# Altium PCB PCB1.PcbDoc
Units mil, origin at the board's own origin, x right, y up, seen from the top; angles counter-clockwise.
Board outline 1687.01 x 1687.01 mil, 4 copper layers (Component Side, Ground Plane, Power Plane, Solder Side), stack 33.234 mil thick; 42 components, 30 nets, 133 pads, 332 vias.
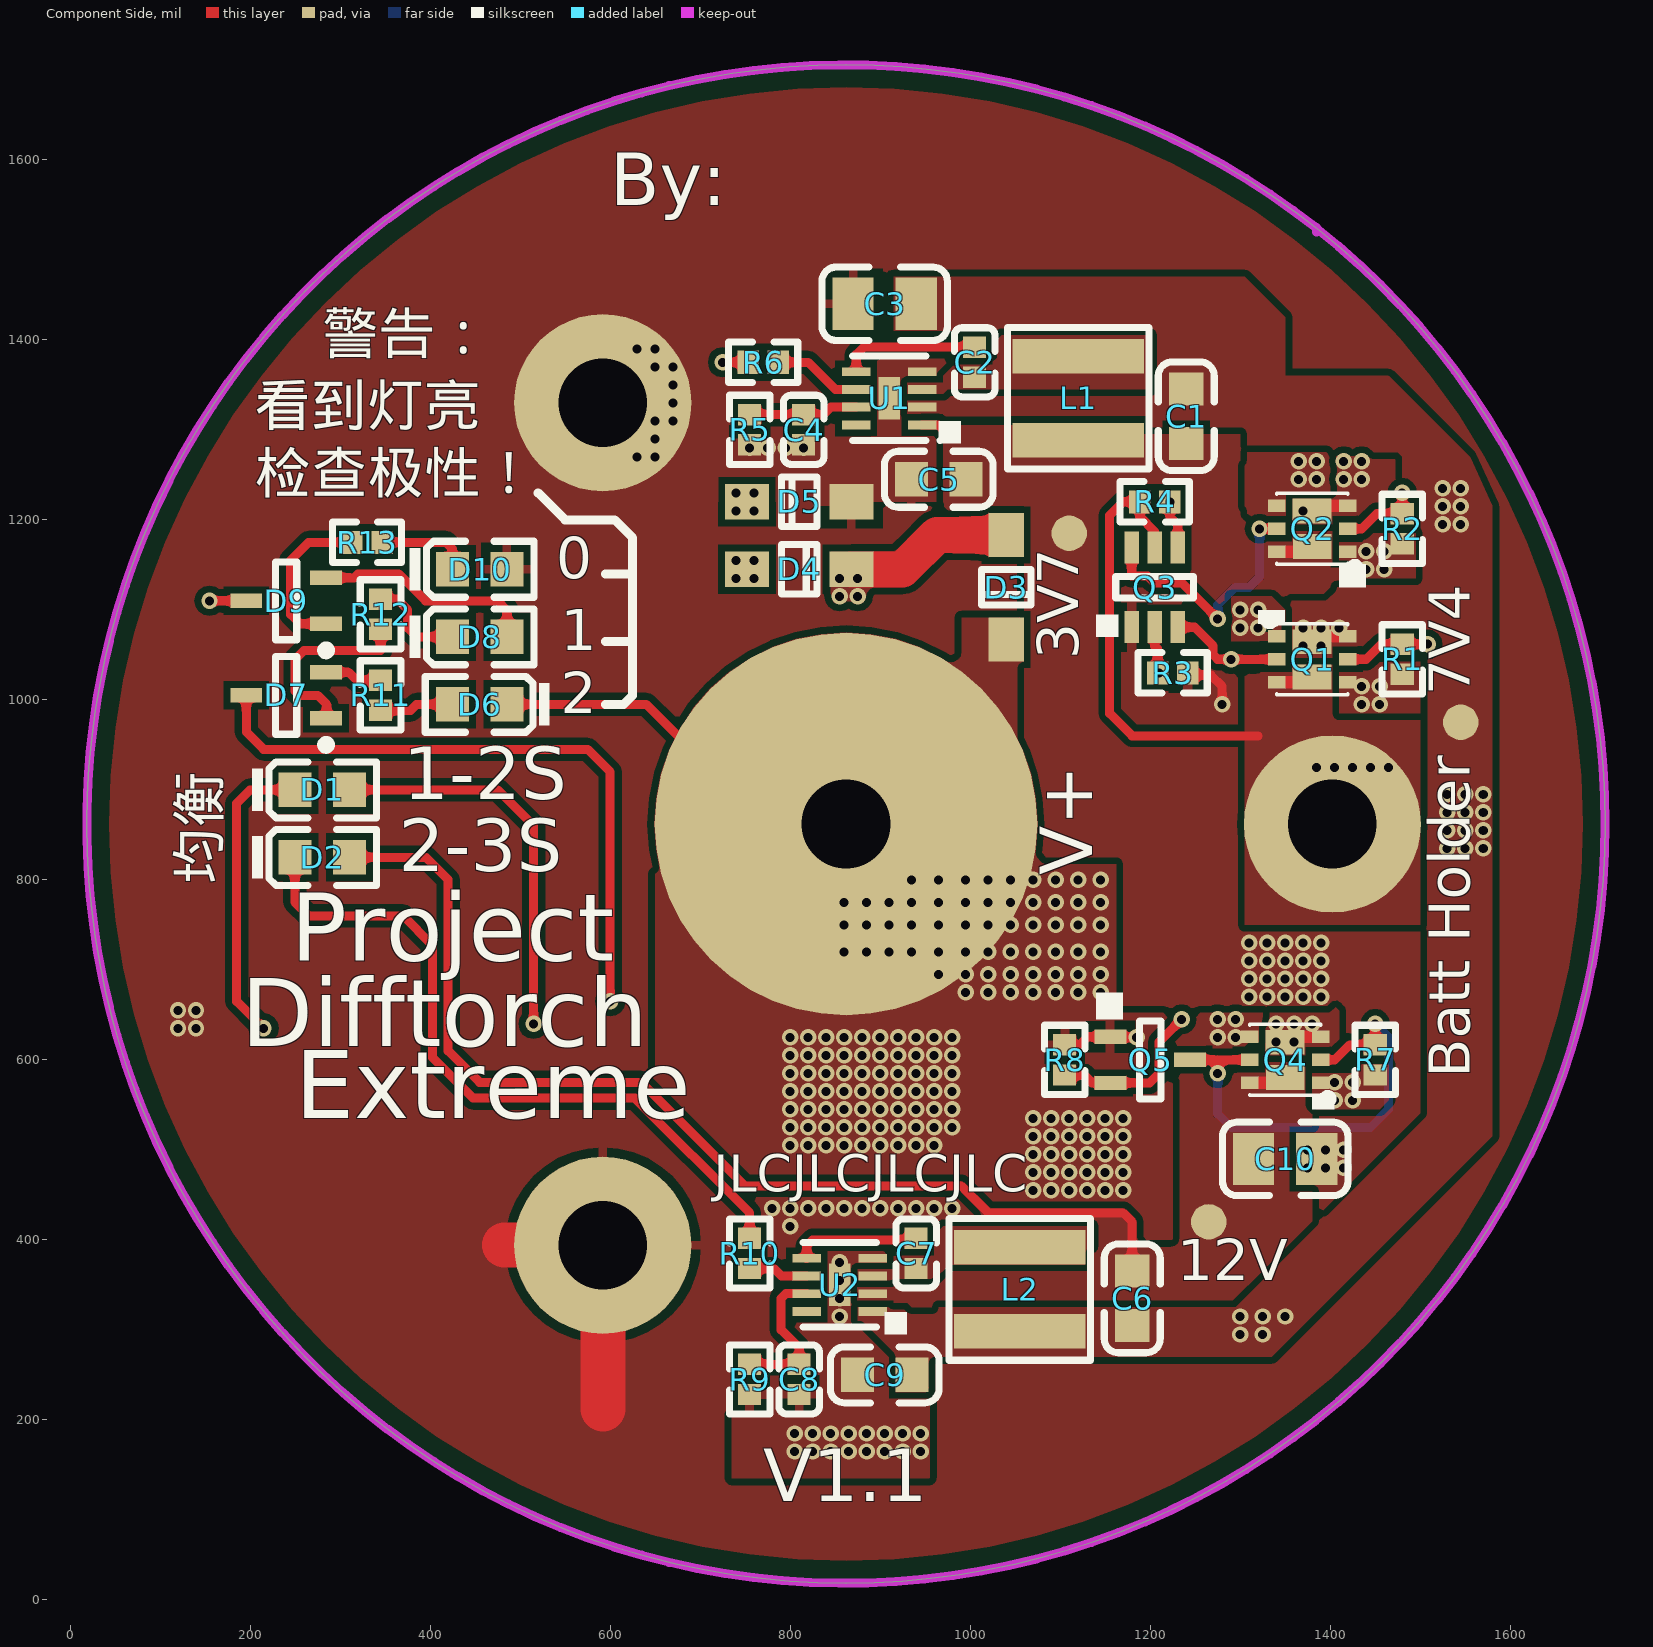
[diagram p0: Component Side view]
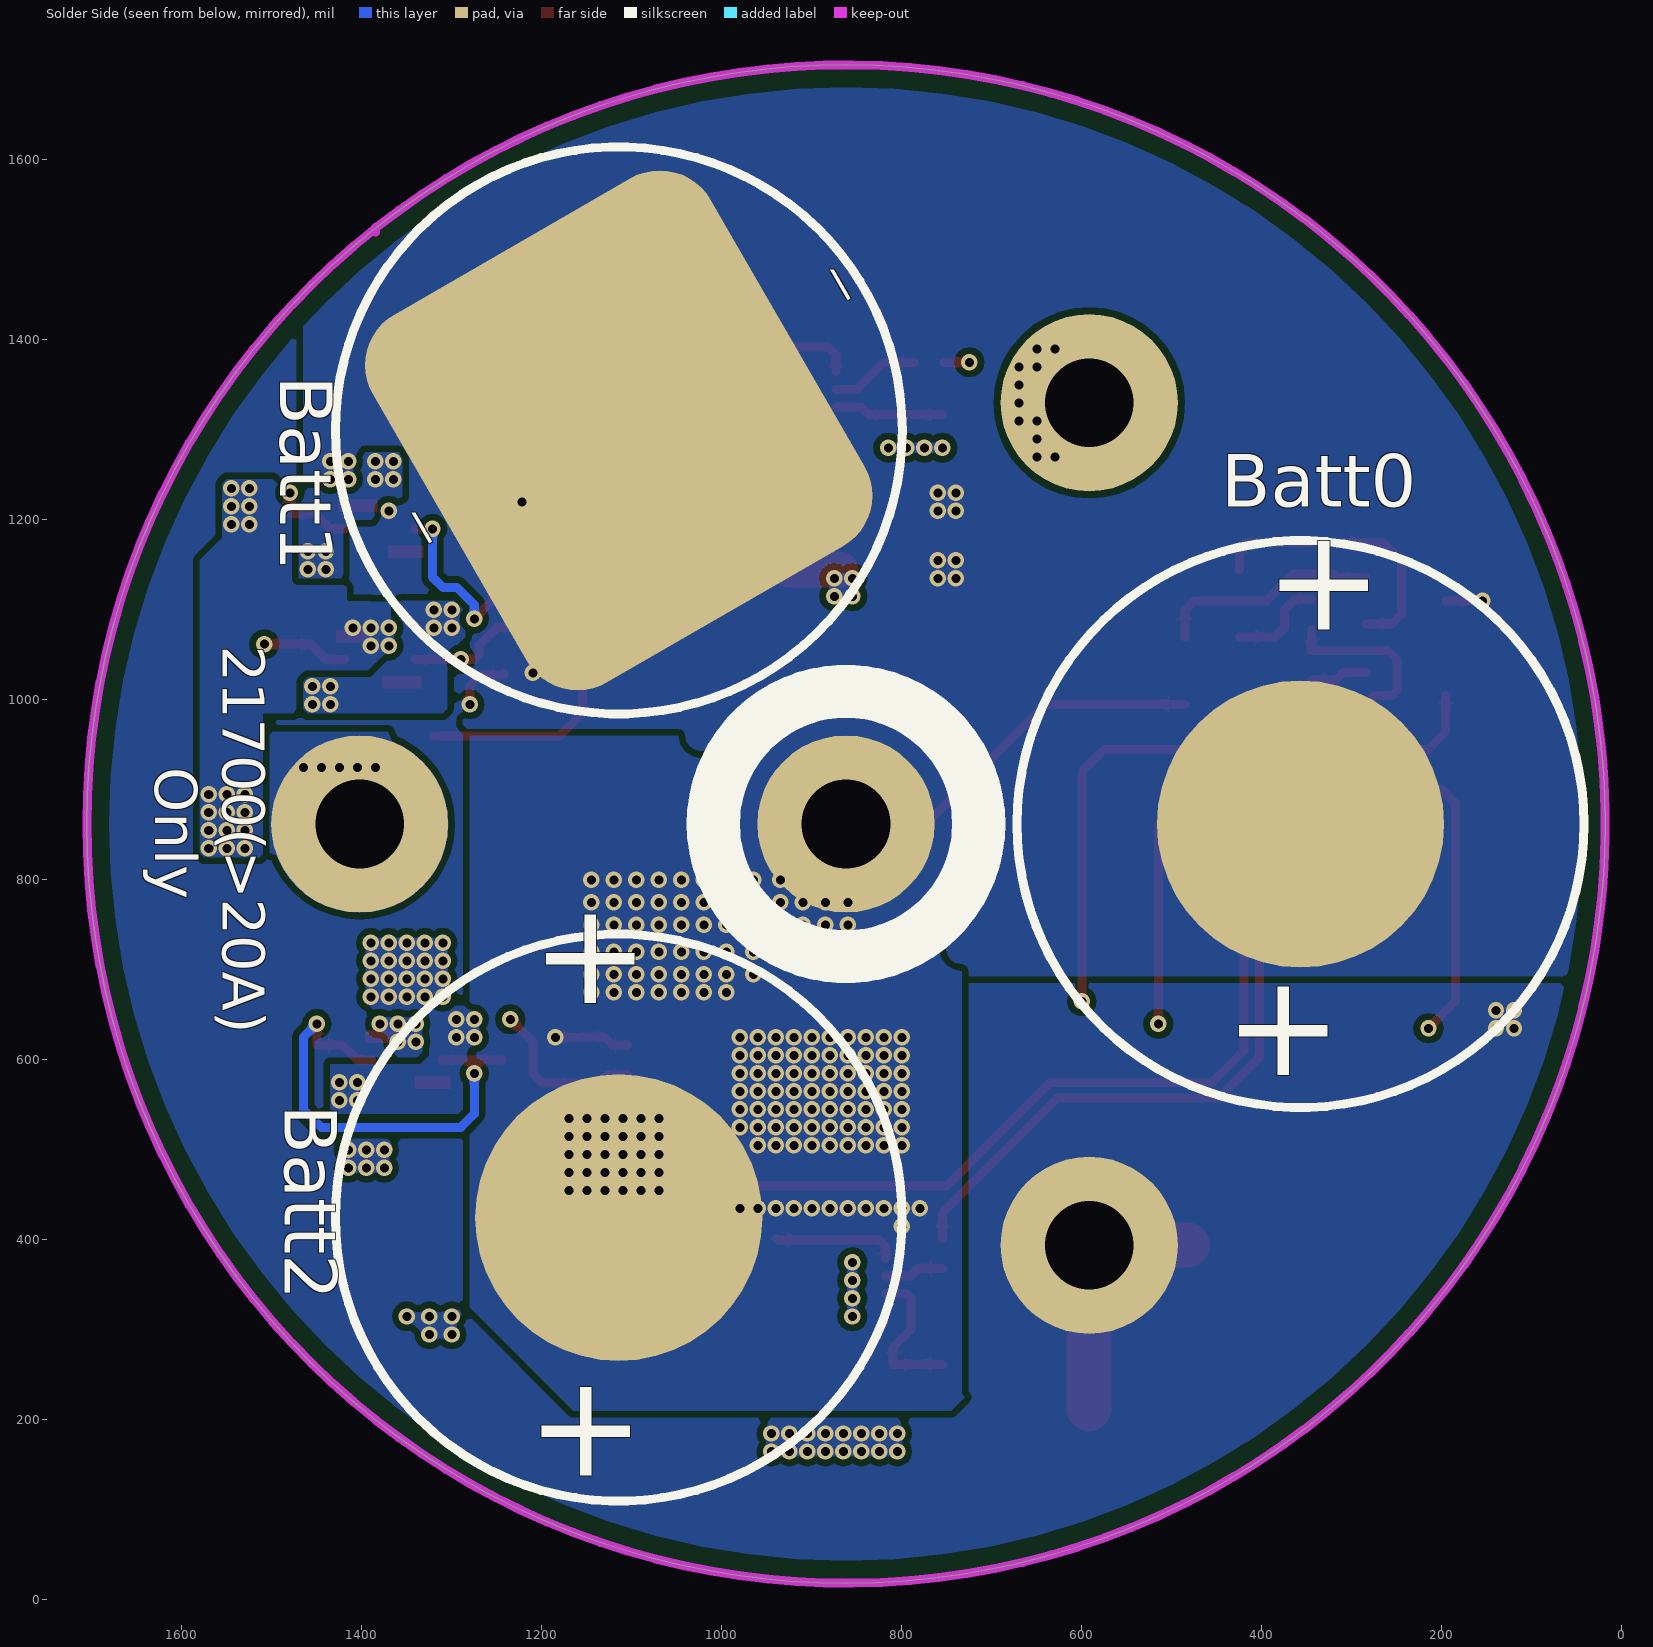
[diagram p1: Solder Side view, seen from below]
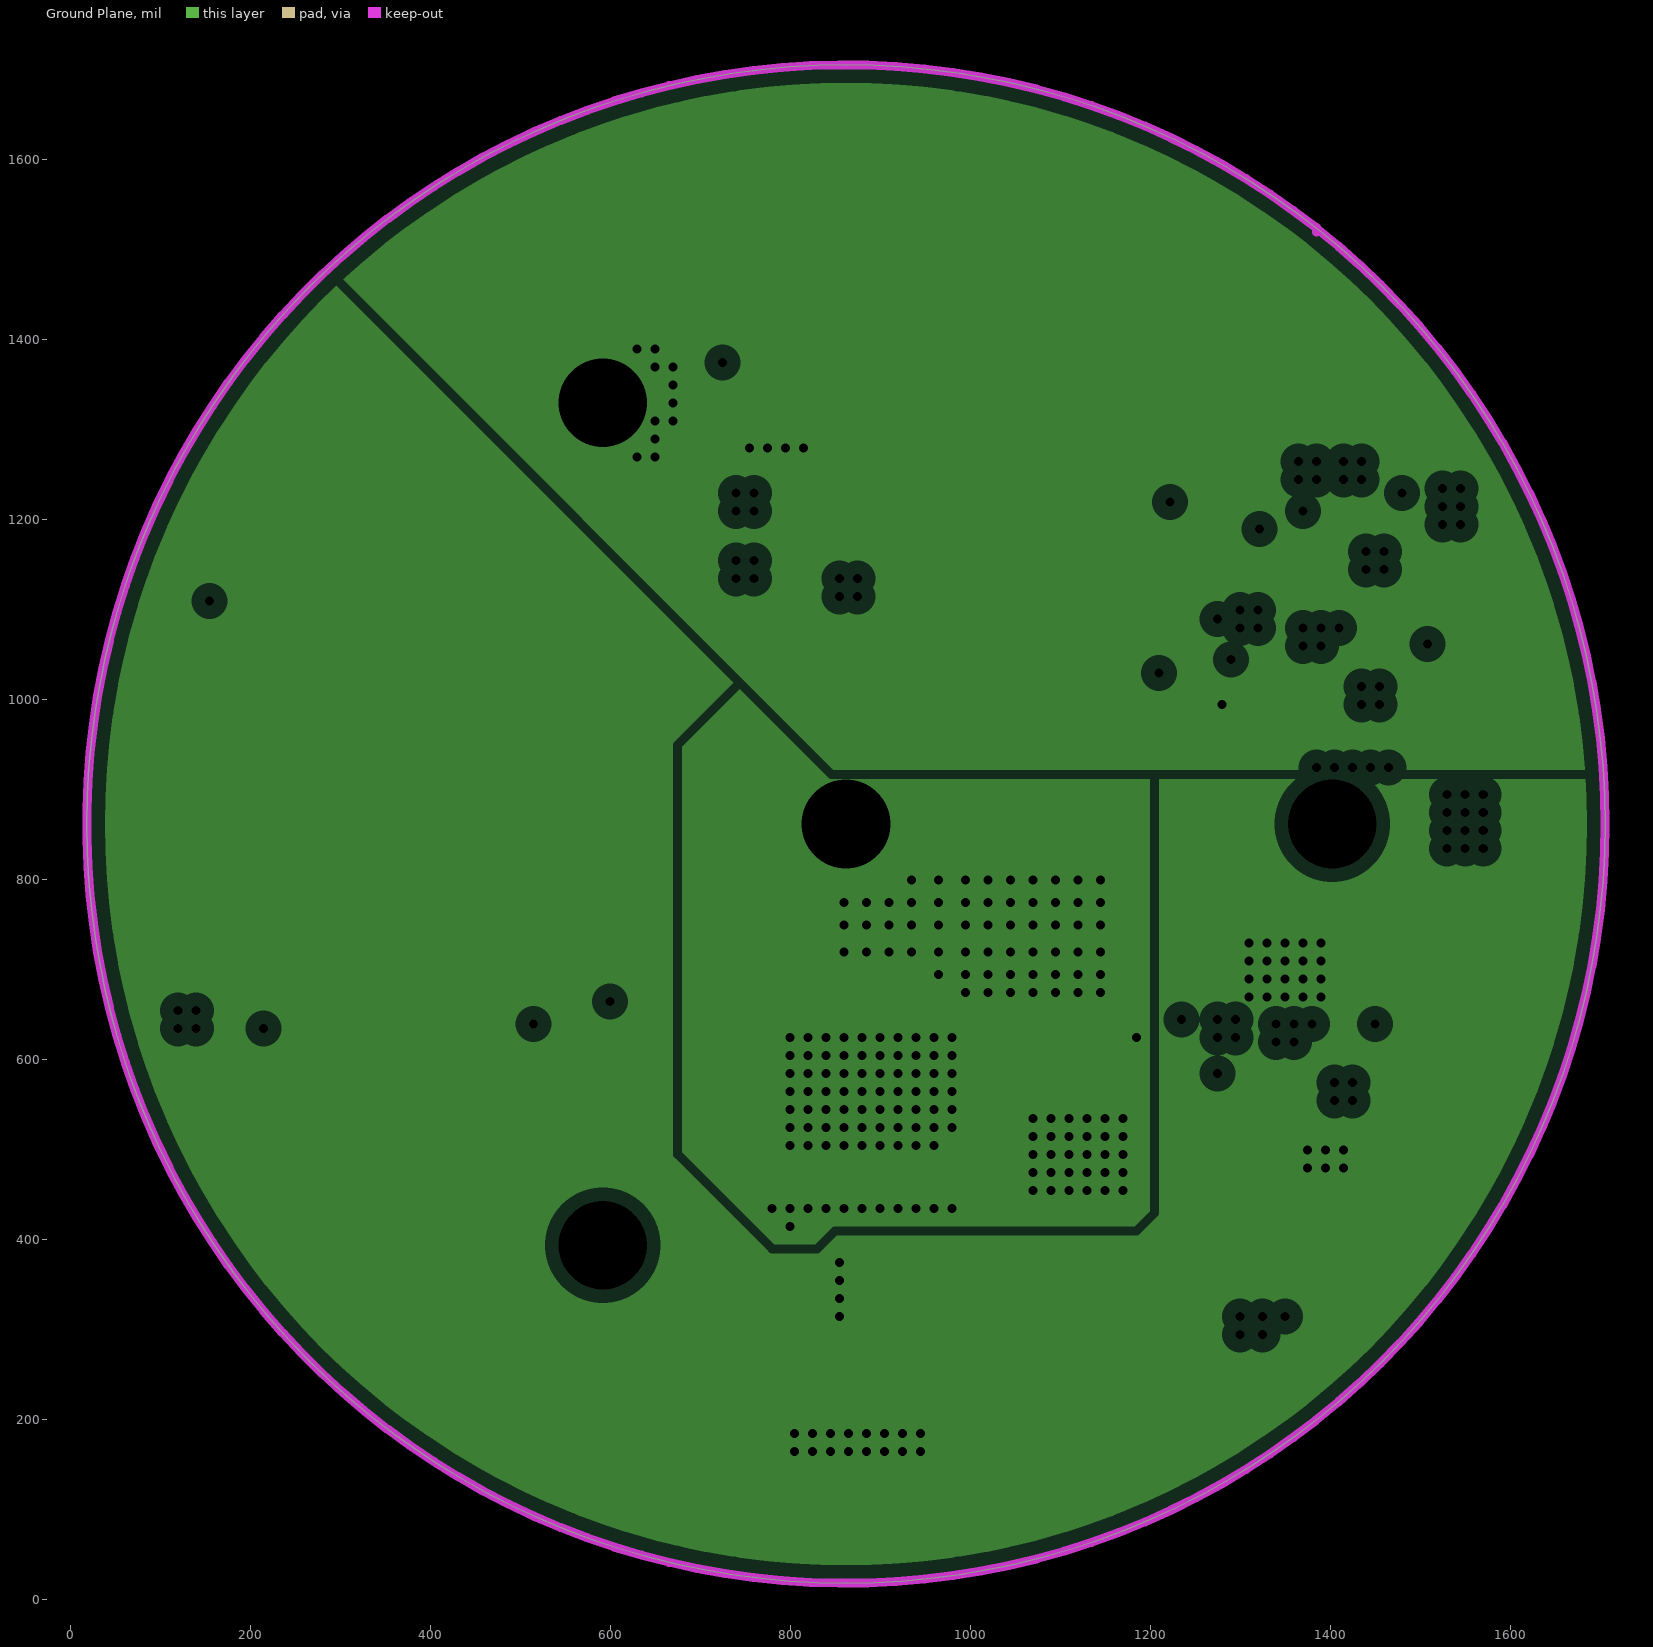
[diagram p2: Ground Plane, clearances drawn from the general rule]
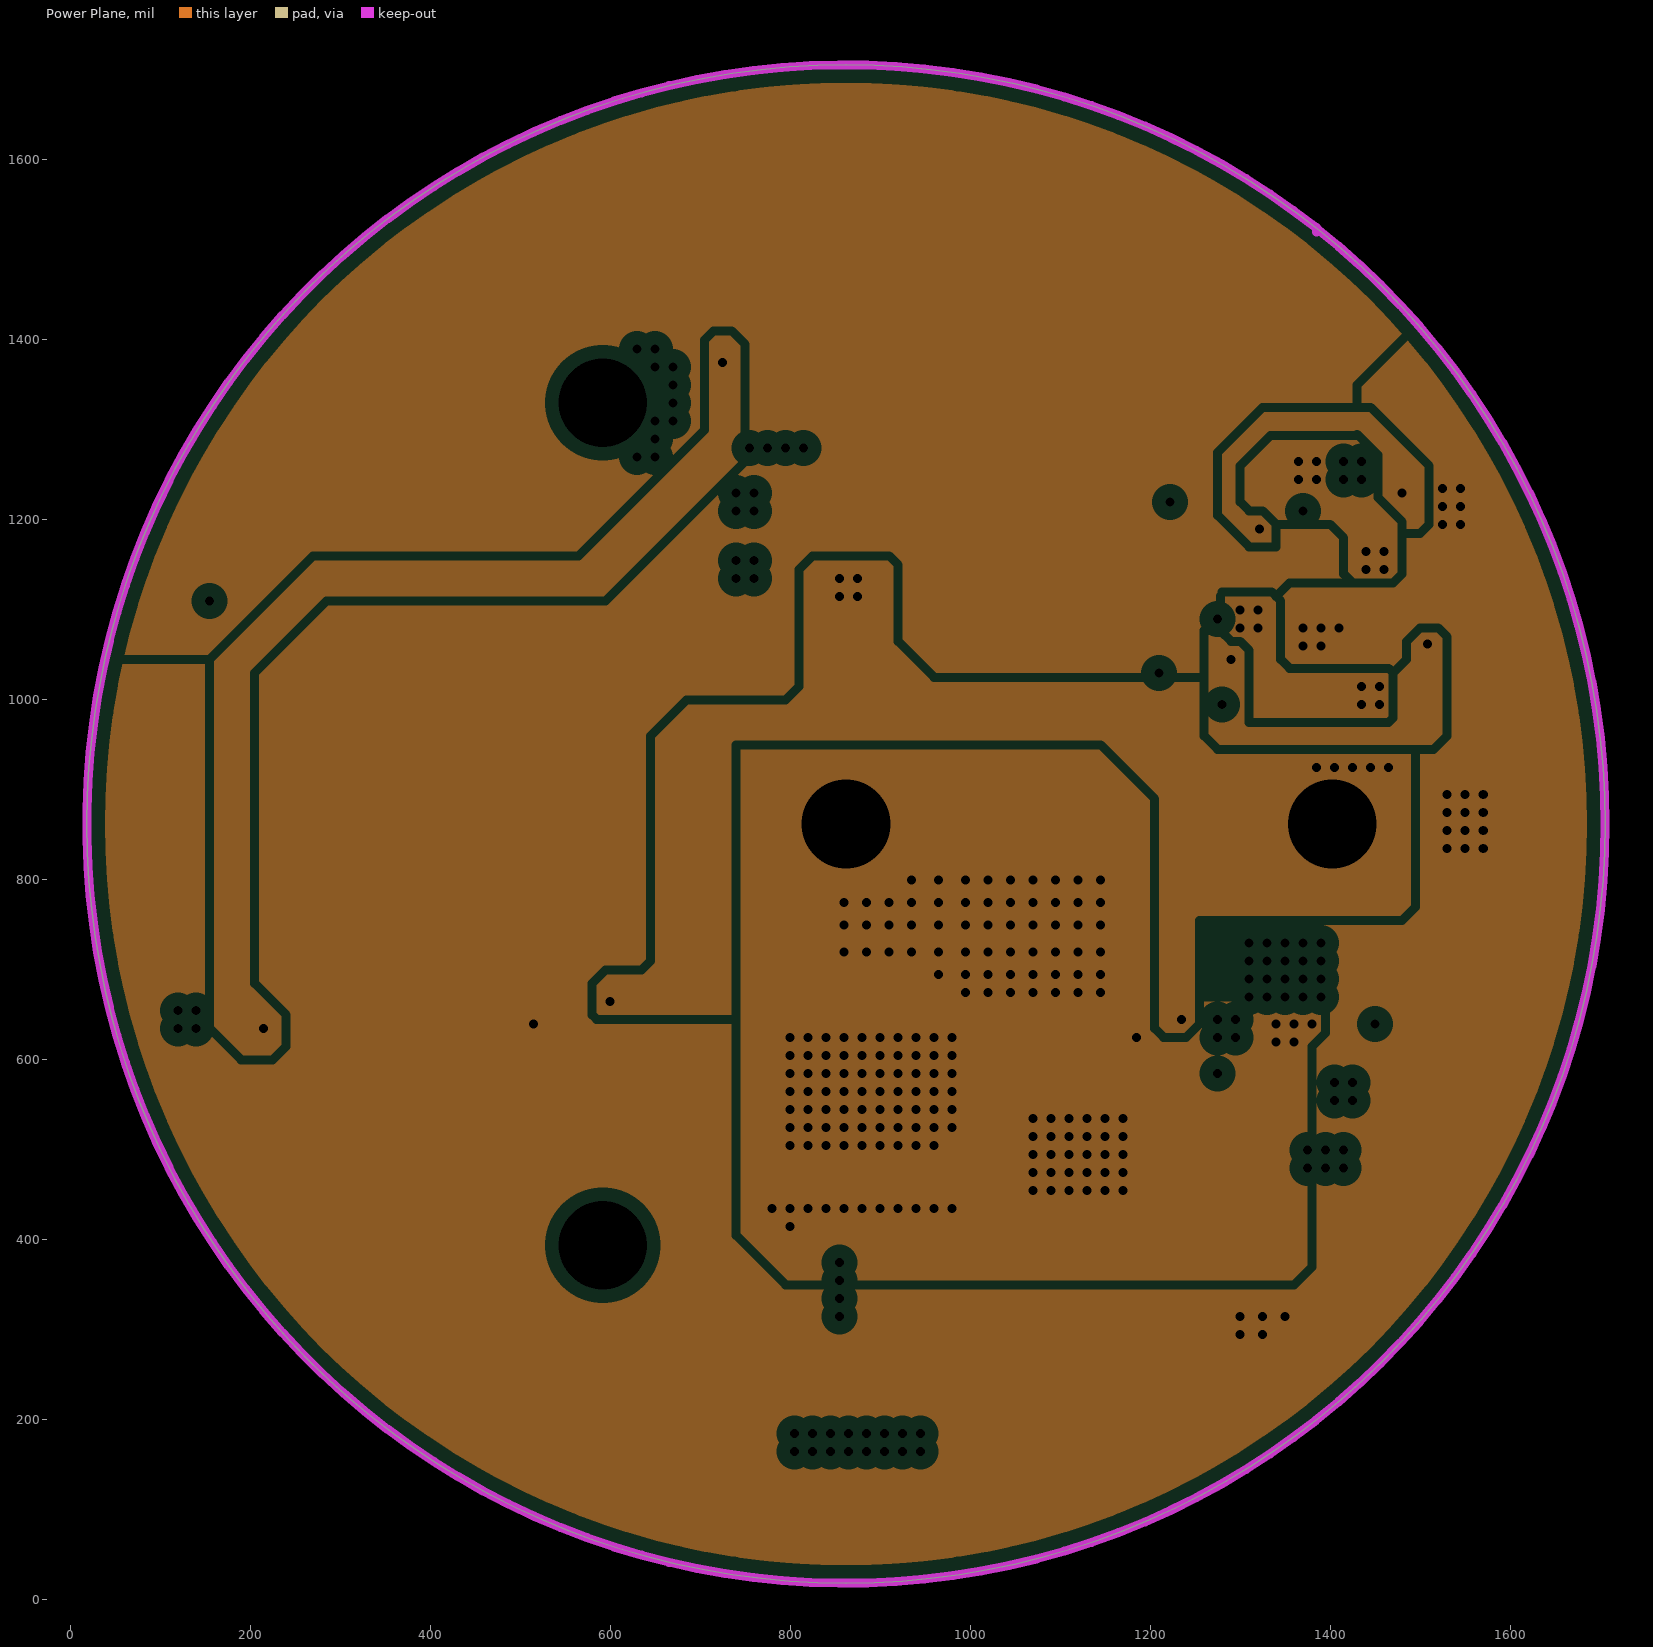
[diagram p3: Power Plane, clearances drawn from the general rule]
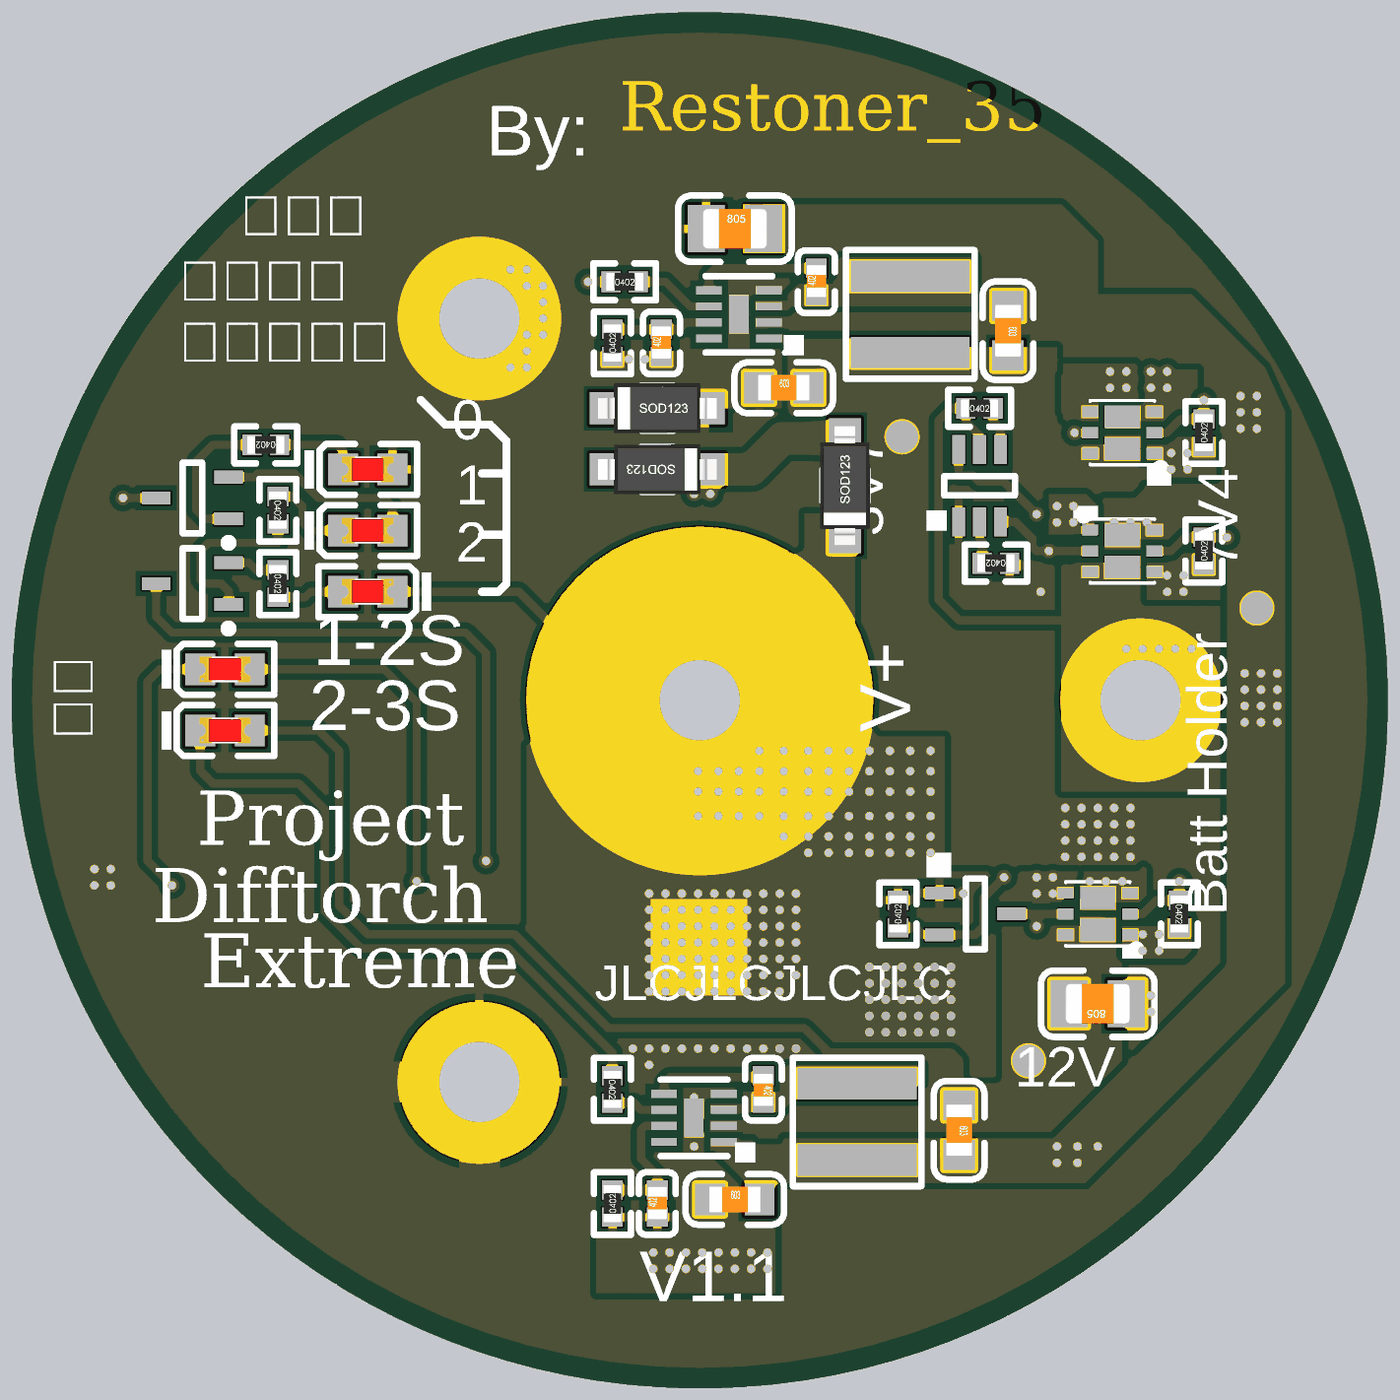
[diagram p4: 3D render of the assembled board from above, using the file's embedded part models]

## Layer stack, top to bottom
Top Solder: solder mask 0.4, Solder Resist, Dk 3.5
Component Side: signal copper 1.4
Dielectric 1: core 12.6, FR-4, Dk 4.8
Ground Plane: plane copper 1.4169, net (Multiple Nets)
Dielectric 3: prepreg 5, Dk 4.2
Power Plane: plane copper 1.4169, net (Multiple Nets)
Dielectric 4: core 10, Dk 4.2
Solder Side: signal copper 1.4
Bottom Solder: solder mask 0.4, Solder Resist, Dk 3.5

## Board outline
862.01,18.5 cw(c862.01,862.01) 18.5,862.01 cw(c862.01,862.01) 862.01,1705.51 cw(c862.01,862.01) 1705.51,862.01 cw(c862.01,862.01)

## Design rules (kind name [scope] priority, off if disabled: settings)
Clearance Clearance_1 [IsArc] p1: gap=20
Clearance [All] p2: gap=7.5
PlaneClearance [All] p1: clearance=15
PlaneConnect [All] p1: planeconnectstyle=Direct reliefexpansion=20 reliefentries=4 reliefconductorwidth=10 reliefairgap=10
PolygonConnect PolygonConnect_1 [IsVia] p1: connectstyle=Direct reliefconductorwidth=10 reliefentries=4 polygonreliefangle="90 Angle" airgapwidth=10
PolygonConnect [All] p2: connectstyle=Direct reliefconductorwidth=10 reliefentries=4 polygonreliefangle="90 Angle" airgapwidth=10
RoomDefinition main [InComponentClass('main')] p1: confinementstyle=ConfineIn formatcopy=TRUE lockcomponents=FALSE outline 1770,55 2910,55 2910,290 1770,290
RoutingVias [All] p1: holewidth=28 width=50 viastyle="Through Hole" minholewidth=28 minwidth=50 maxholewidth=28 maxwidth=50
SolderMaskExpansion [All] p1: expansion=4
Width [All] p1: maxlimit=200 minlimit=8 preferedwidth=10
28 further rules are at their usual default settings.

## Components (designator, comment, footprint, x,y, rotation, side; value= is the part's Value field where it differs from the comment)
C1 "10uF (106) 10% 10V" 0603_C 1240,1315 r270 top
C2 "10nF (103) 10% 50V" 0402_C 1005,1375 r90 top
C3 "22uF (226) 20% 25V" 0805_C 905,1440 r0 top
C4 "1nF (102) 10% 50V" 0402_C 815,1300 r90 top
C5 "10uF (106) 10% 10V" 0603_C 965,1245 r0 top
C6 "10uF (106) 10% 10V" 0603_C 1180,335 r270 top
C7 "10nF (103) 10% 50V" 0402_C 940,385 r270 top
C8 "1nF (102) 10% 50V" 0402_C 810,245 r90 top
C9 "10uF (106) 10% 10V" 0603_C 905,250 r0 top
C10 "22uF (226) 20% 25V" 0805_C 1350,490 r180 top
D1 "白灯 0603" 0603_LED_S1 280,900 r0 top
D2 "白灯 0603" 0603_LED_S1 280,825 r0 top
D3 "SMF5.0CA" SOD-123 1040,1125 r90 top
D4 "SMF5.0CA" SOD-123 810,1145 r180 top
D5 "SMF5.0CA" SOD-123 810,1220 r0 top
D6 "红灯 0603" 0603_LED_S1 455,995 r180 top
D7 "BAV99W" SC70-3 240,1005 r180 top
D8 "红灯 0603" 0603_LED_S1 455,1070 r0 top
D9 "BAV99W" SC70-3 240,1110 r180 top
D10 "红灯 0603" 0603_LED_S1 455,1145 r0 top
L1 "XAL4020-222ME" XAL4020-xxxME 1120,1335 r270 top
L2 "XAL4020-222ME" XAL4020-xxxME 1055,345 r270 top
Q1 "NTLUD3A50PZ" UDFN-6_L2.0-W2.0-P0.65-BL_NTLUD3A50PZ 1380,1045 r270 top
Q2 "NTLUD3A50PZ" UDFN-6_L2.0-W2.0-P0.65-BL_NTLUD3A50PZ 1380,1190 r90 top
Q3 "2N7002DW" SC70-6 1205,1125 r90 top
Q4 "NTLUD3A50PZ" UDFN-6_L2.0-W2.0-P0.65-BL_NTLUD3A50PZ 1350,600 r90 top
Q5 "2N7002KW" SC70-3 1200,600 r0 top
R1 "470KΩ (4703) ±1%" 0402_R 1480,1045 r90 top
R2 "470KΩ (4703) ±1%" 0402_R 1480,1190 r90 top
R3 "1MΩ (1004) ±1%" 0402_R 1225,1030 r180 top
R4 "1MΩ (1004) ±1%" 0402_R 1205,1220 r0 top
R5 "26.1KΩ (2612) ±1%" 0402_R 755,1300 r90 top
R6 "2KΩ (2001) ±1%" 0402_R 770,1375 r0 top
R7 "470KΩ (4703) ±1%" 0402_R 1450,600 r270 top
R8 "1MΩ (1004) ±1%" 0402_R 1105,600 r90 top
R9 "26.1KΩ (2612) ±1%" 0402_R 755,245 r90 top
R10 "2KΩ (2001) ±1%" 0402_R 755,385 r270 top
R11 "1KΩ (1001) ±1%" 0402_R 345,1005 r270 top
R12 "1KΩ (1001) ±1%" 0402_R 345,1095 r270 top
R13 "1KΩ (1001) ±1%" 0402_R 330,1175 r180 top
U1 "ETA3000D2I" DFN2x2-8L 910,1335 r180 top
U2 "ETA3000D2I" DFN2x2-8L 855,350 r180 top

## Footprints (in the part's own frame and the unit in brackets; to place one, negate y for a bottom-side part, rotate by r counter-clockwise, add the part's x,y. Pads: shape width x height; smd on the part's side, far side on the other; paste and mask are expansions set on the pad)
0402_C [mm]
  rect 0.6x0.65 smd mask+0.051: 1(-0.425,0) 2(0.425,0)
  silkscreen extent -0.97,-0.58 0.97,0.58, body extent -0.48,-0.3 0.52,0.3, height 0.2
0402_R [mm]
  rect 0.6x0.65 smd mask+0.051: 1(-0.425,0) 2(0.425,0)
  silkscreen extent -0.97,-0.58 0.97,0.58, body extent -0.57,-0.27 0.58,0.28, height 0.41
0603_C [mm]
  rect 0.93x0.98 smd: 1(-0.77,0) 2(0.77,0)
  silkscreen extent -1.53,-0.79 1.54,0.79, body extent -0.8,-0.4 0.8,0.4, height 0.3
0603_LED_S1 [mm]
  rect 0.93x0.98 smd: A(0.77,0) K(-0.77,0)
  silkscreen extent -1.97,-0.79 1.54,0.79, body extent -0.8,-0.4 0.8,0.4, height 0.6
0805_C [mm]
  rect 1.16x1.47 smd: 1(-0.89,0) 2(0.89,0)
  silkscreen extent -1.77,-1.04 1.77,1.04, body extent -1,-0.62 1,0.63, height 0.77
DFN2x2-8L [mm] "SON, 8-Leads, Body 2.00x2.00mm, Pitch 0.50mm, Thermal Pad 1.20x0.60mm, IPC Medium Density"
  rect 0.8x0.25 smd mask+0.01: 1(-0.93,0.75) 2(-0.93,0.25) 3(-0.93,-0.25) 4(-0.93,-0.75) 5(0.93,-0.75) 6(0.93,-0.25) 7(0.93,0.25) 8(0.93,0.75)
  rect 0.6x1.2 smd mask+0.01: 9(0,0)
  silkscreen extent -1.49,-1.19 1.04,1.24, body extent -1.04,-1.04 1.04,1.04, height 0.8
SC70-3 [mm] "3 Lead SC70(SOT-323) package for small Transistor"
  rect 0.9x0.4 smd mask+0.05: 1(-1.125,0.65) 2(-1.125,-0.65) 3(1.125,0)
  silkscreen extent -1.25,-1.1 0.3,1.52, body extent -0.67,-1.1 0.67,1.1, height 1.1
SC70-6 [mm] "SOT23, 6-Leads, Body 2.00x2.10mm, Pitch 0.65mm, IPC Medium Density"
  rect 0.9x0.4 smd mask+0.05: 1(-1.125,0.65) 2(-1.125,0) 3(-1.125,-0.65) 4(1.125,-0.65) 5(1.125,0) 6(1.125,0.65)
  silkscreen extent -1.25,-1.1 0.3,1.52, body extent -0.67,-1.1 0.67,1.1, height 1.1
SOD-123 [mm]
  rect 1.25x1 smd: 1(1.475,0) 2(-1.475,0)
  silkscreen extent -0.5,-0.7 0.5,0.7, body extent -1.85,-0.77 1.85,0.78, height 1.35
UDFN-6_L2.0-W2.0-P0.65-BL_NTLUD3A50PZ [mm]
  rect 0.35x0.495 smd mask+0.03: 1(-0.65,-1.001) 2(0,-1.001) 3(0.65,-1.001) 4(0.65,1.001) 5(0,1.001) 6(-0.65,1.001)
  rect 0.7x1.1 smd mask+0.03: 3(0.498,0) 6(-0.498,0)
  Component Side region: -0.826,0.226 -0.476,0.226 -0.476,1.239 -0.826,1.239
  Component Side region: 0.475,-1.174 0.826,-1.174 0.826,-0.06 0.475,-0.06
  silkscreen extent -1.22,-1.32 1,1, body extent -1.02,-1.02 1.02,1.02, height 0.55
XAL4020-xxxME [mm] "CoilCraft Molded inductor 4x4mm,2mm height"
  rect 0.98x3.7 smd mask+0.05: 1(-1.185,0) 2(1.185,0)
  silkscreen extent -2,-2 2,2, body extent -2.03,-2.03 2.03,2.03, height 2

## Part data
C1 C5 C6 C9: library part "0603 10uF (106) 10% 10V", "贴片电容"
C2 C7: library part "0402 10nF (103) 10% 50V", "贴片电容"
C3 C10: library part "0805 22uF (226) 20% 25V", "贴片电容"
C4 C8: library part "0402 1nF (102) 10% 50V", "贴片电容"
D1 D2: library part "0603 白灯", "发光二极管"
D3 D4 D5: library part "SOD-123 B5819W  SL", "TVS二极管"
D6 D8 D10: library part "0603 红灯", "发光二极管"
D7 D9: library part "SOT-23 BAV99 A7W", "开关二极管"
L1 L2: library part "Inductor Iron", "Coilcraft XAL4020 Series"
Q1 Q2 Q4: "Dual Symmetric P-MOS -20V -5.6A"
Q3: "Dual N-Channel MOSFET 60V340mA SOT-363"
Q5: library part "2N7002 7002", "MOS(场效应管)"
R1 R2 R7: library part "0402 68KΩ (6802) 1%", "贴片电阻"
R3 R4 R8: library part "0402 1MΩ (1004) 1%", "贴片电阻"
R5 R9: library part "0402 20KΩ (2002) 1%", "贴片电阻"
R6 R10: library part "0402 3.3KΩ (3301) 1%", "贴片电阻"
R11 R12 R13: library part "0402 1KΩ (1001) 1%", "贴片电阻"
U1 U2: "2串锂电池电感主动均衡芯片,DFN2*2封装 2A均衡电流"

## Free pads (board coordinates)
  round 196.85 hole 98.43 mask+1.97: 0(591.83,1329.97) 1(1402.36,862.01) 2(591.83,394.05)
  round 39.37 smd mask+1.97: 0(1110,1185) 1(1545,975) 2(1265,420)
  round 425.2 / inner round 196.85 / far side round 196.85 hole 98.43 mask+1.97: 3(862.01,862.01)
  rrect30% 472.44x433.07 smd far side rot 60 mask+1.97: 4(1114.47,1299.28)
  round 318.9 smd far side mask+1.97: 5(357.09,862.01) 6(1114.47,424.73)

## Via types
v1: diameter 18, hole 10, Component Side to Solder Side, tented both sides, 332 vias

## Nets (pads, with @x,y where several pads share a name; then routed paths per layer and width w, separated by ;. In a path a pad name is that pad's centre, name@x,y a point inside that pad or via, vN(x,y) a via of type N, cw(c..) or ccw(c..) an arc to the next point about the centre after c; other vN are vias at no path point)
3.7V: D4.1 D5.2 D9.3 pad.4 pad.5 Q2.3 Q3.2 Q3.4 R3.2 R4.2 | length 147.1
  Component Side w10: v1(155,1110) D9.3 ; Q3.2 1205,1060 1208.27,1056.73 R3.2 ; v1(1221.73,1220) 1221.73,1203.27 1230.59,1194.41 Q3.4
  other v1: 1210,1030 740,1135 760,1135 740,1155 760,1155 740,1210 760,1210 1370,1210 740,1230 760,1230 1415,1245 1435,1245 1415,1265 1435,1265
7.4V: D3.1 D4.2 D7.3 pad.1@1402.36,862.01 Q1.3 Q3.5 Q5.2 R4.1 R8.1 | length 1571.9
  Component Side w10: D7.3 195.71,964.29 215,945 575,945 600,920 v1(600,665) ; R8.1 1126.73,583.27 1135.59,574.41 Q5.2 1199.41,574.41 1210,585 1210,620 v1(1235,645) ; Q3.5 1205,1186.97 1188.27,1203.7 R4.1 1170,1220 1155,1205 1155,985 1180,960 1320,960
  Component Side w40: D4.2 925,1145 963.07,1183.07 D3.1@1030,1183.07
  other v1: 1385,925 1405,925 1425,925 1445,925 1465,925 855,1115 875,1115 855,1135 875,1135
12V: D3.2 D6.K pad.3 pad.6 Q4.3 Q5.1 R8.2 | length 514.9
  Component Side w10: D6.K 640,995 772.99,862.01 pad.3 ; R8.2 1121.73,616.73 1130.59,625.59 Q5.1 ; Q5.1@1156.3,625 v1(1185,625)
  other v1: 800,415 780,435 800,435 820,435 840,435 860,435 880,435 900,435 920,435 940,435 960,435 980,435 1070,455 1090,455 1110,455 1130,455 1150,455 1170,455 1070,475 1090,475 1110,475 1130,475 1150,475 1170,475 1070,495 1090,495 1110,495 1130,495 1150,495 1170,495 800,505 820,505 840,505 860,505 880,505 900,505 920,505 940,505 960,505 1070,515 1090,515 1110,515 1130,515 1150,515 1170,515 800,525 820,525 840,525 860,525 880,525 900,525 920,525 940,525 960,525 980,525 1070,535 1090,535 1110,535 1130,535 1150,535 1170,535 800,545 820,545 840,545 860,545 880,545 900,545 920,545 940,545 960,545 980,545 800,565 820,565 840,565 860,565 880,565 900,565 920,565 940,565 960,565 980,565 800,585 820,585 840,585 860,585 880,585 900,585 920,585 940,585 960,585 980,585 800,605 820,605 840,605 860,605 880,605 900,605 920,605 940,605 960,605 980,605 1340,620 1360,620 800,625 820,625 840,625 860,625 880,625 900,625 920,625 940,625 960,625 980,625 1340,640 1360,640 1380,640 995,675 1020,675 1045,675 1070,675 1095,675 1120,675 1145,675 965,695 995,695 1020,695 1045,695 1070,695 1095,695 1120,695 1145,695 860,720 885,720 910,720 935,720 965,720 995,720 1020,720 1045,720 1070,720 1095,720 1120,720 1145,720 860,750 885,750 910,750 935,750 965,750 995,750 1020,750 1045,750 1070,750 1095,750 1120,750 1145,750 860,775 885,775 910,775 935,775 965,775 995,775 1020,775 1045,775 1070,775 1095,775 1120,775 1145,775 935,800 965,800 995,800 1020,800 1045,800 1070,800 1095,800 1120,800 1145,800
BST1: C2.2 U1.5 | length 153.9
  Component Side w10: U1.5 873.39,1383.39 881.73,1391.73 C2.2
BST2: C7.1 U2.5 | length 138.9
  Component Side w10: U2.5 818.39,393.39 825,400 938.27,400 C7.1
CELL1: C1.2 C5.2 C8.1 C9.1 C10.1 L1.2 pad.0@1110,1185 Q2.6 R9.1 U1.1 U2.4 U2.9 | length 32.7
  Component Side w10: U1.1 964.53,1305.47 975,1295
  other v1: 805,165 825,165 845,165 865,165 885,165 905,165 925,165 945,165 805,185 825,185 845,185 865,185 885,185 905,185 925,185 945,185 855,315 855,335 855,355 855,375 1375,480 1395,480 1415,480 1375,500 1395,500 1415,500 1310,670 1330,670 1350,670 1370,670 1390,670 1310,690 1330,690 1350,690 1370,690 1390,690 1310,710 1330,710 1350,710 1370,710 1390,710 1310,730 1330,730 1350,730 1370,730 1390,730
CELL2: C1.1 C3.2 C6.2 C9.2 D1.A L2.2 pad.1@1545,975 Q1.6 U1.2 U2.1 | length 441.3
  Component Side w10: D1.A 475,900 515,860 v1(515,640)
  other v1: 1300,295 1325,295 1300,315 1325,315 1350,315 1530,835 1550,835 1570,835 1530,855 1550,855 1570,855 1530,875 1550,875 1570,875 1530,895 1550,895 1570,895 1370,1060 1390,1060 1370,1080 1390,1080 1410,1080 1525,1195 1545,1195 1525,1215 1545,1215 1525,1235 1545,1235
CELL3: C6.1 C10.2 D2.A pad.2@1265,420 Q4.6 U2.2 | length 1203.5
  Component Side w10: D2.A 395.16,825 420,800.16 420,610 455,575 634.75,575 749.75,460 990,460 1020,430 1170,430 1180,420 C6.1
G3.7: Q2.2 Q2.5 Q3.6 R2.2 | length 385.3
  Component Side w10: Q3.6 1179.41,1137.5 1197.25,1137.5 1204.75,1130 1235,1130 v1(1275,1090) ; v1(1321.43,1190) Q2.5 ; Q2.2 1435,1190 1451.73,1206.73 R2.2 v1(1480,1230)
  Solder Side w10: v1(1275,1090) 1275,1105.41 1294.59,1125 1310,1125 1321.43,1136.43 v1(1321.43,1190)
G7.4: Q1.2 Q1.5 Q3.3 R1.2 | length 226.5
  Component Side w10: Q3.3 1249.29,1080.71 1270,1060 1270,1050 1275,1045 v1(1290,1045) Q1.2 ; Q1.5 1440,1045 1456.73,1061.73 R1.2 v1(1508.27,1061.73)
G12: Q4.2 Q4.5 Q5.3 R7.1 | length 522.8
  Component Side w10: Q5.3 1275,600 ; v1(1275,585) 1275,600 ; Q4.5 1275,600 ; Q4.2 1405,600 1421.73,616.73 R7.1 v1(1450,640)
  Solder Side w10: v1(1275,585) 1275,540 1290,525 1445,525 1465,545 1465,625 v1(1450,640)
GND: C3.1 C4.1 C5.1 D5.1 D10.A pad.0@591.83,1329.97 pad.2@591.83,394.05 Q3.1 R3.1 R5.1 U1.4 U1.9 | length 357.2
  Component Side w10: R3.1 1241.73,1027.5 1267.5,1027.5 1280,1015 v1(1280,995)
  Component Side w50: 482.78,394.05 591.83,394.05 591.83,211.83
  other v1: 120,635 140,635 120,655 140,655 630,1270 650,1270 755,1280 775,1280 795,1280 815,1280 650,1290 650,1310 670,1310 670,1330 670,1350 650,1370 670,1370 630,1390 650,1390
NetC4_2: C4.2 R5.2 U1.7 | length 121.9
  Component Side w10: R5.2 C4.2 836.73,1316.73 845.16,1325.16 U1.7
NetC8_2: C8.2 R9.2 U2.7 | length 167.1
  Component Side w10: R9.2 C8.2 810,280 790,300 790,335 795.16,340.16 U2.7
NetD1_K: D1.K R6.1 | length 361.6
  Component Side w10: v1(215,635) 185,665 185,885 200,900 D1.K ; v1(725,1375) R6.1
NetD2_K: D2.K R10.1 | length 799.4
  Component Side w10: D2.K 249.69,775.31 265,760 370,760 402.5,727.5 402.5,602.75 447.75,557.5 627.5,557.5 755,430 R10.1
NetD6_A: D6.A R11.2 | length 82.5
  Component Side w10: R11.2 378.27,988.27 385,995 D6.A
NetD7_1: D7.1 R12.2 | length 214.5
  Component Side w10: D7.1 285,980.12 285,995 275,1005 255,1005 250,1010 250,1045 260,1055 345,1055 R12.2
NetD7_2: D7.2 R11.1 | length 64.4
  Component Side w10: D7.2 309.41,1030.59 318.27,1021.73 R11.1
NetD8_A: D8.A D9.2 | length 249.2
  Component Side w10: D9.2 315.59,1135.59 320,1140 365,1140 395,1110 475,1110 485.32,1099.68 D8.A
NetD8_K: D8.K R12.1 | length 108.7
  Component Side w10: R12.1 363.27,1111.73 375,1100 375,1080 385,1070 D8.K
NetD9_1: D9.1 R13.2 | length 180.2
  Component Side w10: D9.1 255.59,1084.41 245,1095 245,1155 265,1175 R13.2
NetD10_K: D10.K R13.1 | length 103.7
  Component Side w10: R13.1 417.34,1175 424.69,1167.66 D10.K
S3.7: Q2.1 Q2.4 R2.1
  other v1: 1440,1145 1460,1145 1440,1165 1460,1165 1365,1245 1385,1245 1365,1265 1385,1265
S7.4: Q1.1 Q1.4 R1.1
  other v1: 1435,995 1455,995 1435,1015 1455,1015 1300,1080 1320,1080 1300,1100 1320,1100
S12: Q4.1 Q4.4 R7.2
  other v1: 1405,555 1425,555 1405,575 1425,575 1275,625 1295,625 1275,645 1295,645
STAT1: R6.2 U1.6 | length 99.1
  Component Side w10: R6.2 820,1375 850.16,1344.84 U1.6
STAT2: R10.2 U2.6 | length 66.9
  Component Side w10: R10.2 781.73,368.27 790.16,359.84 U2.6
SW1: C2.1 L1.1 U1.3
SW2: C7.2 L2.1 U2.3
pads on no net: U1.8 U2.8

## Polygon pours and split planes (outlines as drawn)
GND on Solder Side "Component Side-No Net 1" (solid, remove dead copper, pour order 151): 720,1295 865,1295 865,1250 855,1260 715,1260
7.4V on Solder Side "Component Side-No Net 1" (solid, remove dead copper, pour order 149): 835,1165 835,1085 840,1080 915,1080 915,1160 920,1165
GND on Solder Side "Component Side-No Net 1" (solid, remove dead copper, pour order 143): 1400,1490 1230,1320 1230,870 1230,555 1170,495 1110,555 520,555 510,555 440,485 430,475 430,190 430,55 475,10 485,0 1655,0 1655,310 1835,490 1825,500 1825,1545
3.7V on Solder Side "Component Side-No Net 1" (solid, remove dead copper, pour order 139): 1477.65,1438.62 1465,1425.97 1465,990 1305,990 1300,985 1280,965 1280,862.01 1280,595 1160,475 1155,470 -240,470 -240,1875 -230,1885 -165,1950 1460,1950
S3.7 on Solder Side "Component Side-No Net 1" (solid, remove dead copper, pour order 135): 1355,1275 1355,1270 1355,1210 1360,1205 1365,1200 1400,1200 1410,1200 1420,1190 1420.76,1189.24 1420.76,1127.35 1473.17,1127.35 1475.41,1129.59 1477.65,1131.83 1477.65,1211.25 1477.65,1227.65 1480,1230 1475,1235 1430,1235 1410,1235 1405,1240 1405,1275
S7.4 on Solder Side "Component Side-No Net 1" (solid, remove dead copper, pour order 75): 1285,1115 1290,1110 1360,1110 1360,1055 1365,1050 1390,1025 1450,1025 1460,1025 1465,1020 1465,990 1460,985 1410,985 1310,985 1305,990 1305,995 1305,1050 1285,1070
CELL2 on Solder Side "Component Side-No Net 1" (solid, remove dead copper, pour order 86): 1360,1108.47 1360,1055 1371.82,1043.18 1460,985 1510,985 1510,825 1570,825 1575,825 1580,830 1580,1035 1580,1155 1555,1180 1555,1240 1550,1245 1510,1245 1498.88,1245 1470,1216.12 1463.88,1210 1410,1210 1410,1146.98 1416.44,1140.54 1416.44,1111.44 1415,1110
12V on Solder Side "Component Side-No Net 1" (solid, remove dead copper, pour order 90): 1022.93,960.67 1023.6,960 1280,960 1280,325 1165,210 970,210 745,210 730,225 733.31,228.31 733.31,723.92 676.08,723.92 595,805 585,815 585,1055 610,1055 690,1135 710,1155 1030,1155 1020,1145
S12 on Solder Side "Component Side-No Net 1" (solid, remove dead copper, pour order 94): 1263.1,613.1 1272.13,613.1 1280,605.23 1280,540 1430,540 1435,545 1435,585 1350,585 1320,585 1310,585 1305,590 1305,650 1300,655 1245,655 1245,595 1240,590 1240,600
S12 on Solder Side "Component Side-No Net 1" (solid, remove dead copper, pour order 95): 1259.46,651.44 1259.46,653.25 1263.1,656.9 1266.21,660 1310,660 1320,660 1325,655 1325,625 1325,605 1330,600 1335,595 1425,595 1435,595 1435,585 1435,565 1420,550 1350,550 1260,550
CELL1 on Solder Side "Component Side-No Net 1" (solid, remove dead copper, pour order 104): 795,440 800,435 910,435 910,285 895,270 890,265 785,265
GND on Solder Side "Component Side-No Net 1" (solid, remove dead copper, pour order 110): 55,685 735,685 740,690 745,685 745,220 1175,220 1183.31,228.31 1280,325 1280,985 1285,990 1295,1000 1755,1010 1755,250 1760,245 1445,-70 1170,-70 140,-70 80,-10
7.4V on Solder Side "Component Side-No Net 1" (solid, remove dead copper, pour order 111): 1330,975 1540,975 1540,795 1515,770 1502.06,757.06 1418.98,757.06 1320.24,757.06 1310,746.82 1295,761.82 1295,970
CELL1 on Solder Side "Component Side-No Net 1" (solid, remove dead copper, pour order 112): 1287.65,757.06 1457.94,757.06 1465,750 1475,740 1475,655 1271.99,655 1267.3,659.7 1260,666.99 1260,755
12V on Solder Side "Component Side-No Net 1" (solid, remove dead copper, pour order 113): 1301.79,666.26 1417.72,666.26 1435.69,648.28 1435,647.59 1435,602.65 1295.81,602.65 1288.16,595
CELL1 on Solder Side "Component Side-No Net 1" (solid, remove dead copper, pour order 114): 1330,515 1475,515 1475,460 1465,450 1450,435 1320,435
CELL1 on Solder Side "Component Side-No Net 1" (solid, remove dead copper, pour order 115): 745,225 1020,225 1030,215 1030,140 750,140 720,110
CELL2 on Solder Side "Component Side-No Net 1" (solid, remove dead copper, pour order 120): 1280,355 1280,260 1370,260 1375,265 1395,285 1395,375
GND on Component Side "Component Side-No Net 1" (solid, remove dead copper, pour order 69): 710,1465 710,1180 700,1170 665,1205 495,1205 465,1205 420,1250 430,1260 430,1440 440,1440 460,1460
GND on Component Side "Component Side-No Net 1" (solid, remove dead copper, pour order 67): -185,1860 -130,1805 1735,1805 1735,5 1740,0 1685,-55 -250,-55
CELL3 on Component Side "Component Side-No Net 1" (solid, remove dead copper, pour order 20): 980,465 990,455 990,340 1230,340 1240,330 1245,335 1245,430 1245,475 1240,480
CELL1 on Component Side "Component Side-No Net 1" (solid, remove dead copper, pour order 159): 923.37,1301.38 943.46,1281.29 943.46,1202.68 1092.32,1202.68 1105,1190 1105,1265 1105,1302.71 1109.78,1307.49
CELL1 on Component Side "Component Side-No Net 1" (solid, remove dead copper, pour order 157): 1065,1250 1065,1070 1145,1070 1155,1060 1155,1235 1100,1235 1085,1250
12V on Component Side "Component Side-No Net 1" (solid, remove dead copper, pour order 155): 987.54,1098.45 987.54,887.46 1020,855 1115,855 1115,1080 1095,1100
CELL1 on Component Side "Component Side-No Net 1" (solid, remove dead copper, pour order 153): 970,1220 1055,1220 1060,1215 1060,1055 1060,650 1080,630 1505,630 1505,1270 1495,1280 1480,1295 975,1295
7.4V on Component Side "Component Side-No Net 1" (solid, remove dead copper, pour order 147): 845,1180 845,1100 850,1095 935,1095 935,1191.4 933.59,1192.82 931.4,1195 830,1195
12V on Component Side "Component Side-No Net 1" (solid, remove dead copper, pour order 145): 955,1115 1065,1115 1085,1095 1045,1055 1045,910 880,910 875,905 900.18,930.18 900.18,1117.81
GND on Component Side "Component Side-No Net 1" (solid, remove dead copper, pour order 137): 1151.72,1101.92 1150,980 1165,965 1320,965 1330,955 1334.25,959.25 1334.25,1115 1155,1115 1145,1125
3.7V on Component Side "Component Side-No Net 1" (solid, remove dead copper, pour order 133): 1395.82,1282.65 1398.47,1280 1485,1280 1485,1200 1465,1180 1340,1180 1340,1295 1330,1305
S3.7 on Component Side "Component Side-No Net 1" (solid, remove dead copper, pour order 131): 1400,1275 1400,1215 1389.39,1204.39 1329.59,1204.39 1329.59,1274.59 1330,1275
S3.7 on Component Side "Component Side-No Net 1" (solid, remove dead copper, pour order 127): 1390,1220 1390,1282.65 1307.65,1282.65 1303.25,1278.25 1303.25,1186.75 1386.75,1186.75 1390,1190
S3.7 on Component Side "Component Side-No Net 1" (solid, remove dead copper, pour order 62): 1305,1260 1305,1215 1310,1210 1350,1210 1350,1260
S3.7 on Component Side "Component Side-No Net 1" (solid, remove dead copper, pour order 63): 1410,1175 1410,1155 1420,1155 1430,1145 1430,1135 1435,1135 1495,1135 1495,1185 1460,1185 1445,1185 1435,1175
CELL1 on Component Side "Component Side-No Net 1" (solid, remove dead copper, pour order 68): 1330,1185 1330,1145 1410,1145 1410,1195 1405,1190 1330,1190
S7.4 on Component Side "Component Side-No Net 1" (solid, remove dead copper, pour order 69): 1290,1115 1335,1115 1350,1100 1350,1065 1290,1065
CELL2 on Component Side "Component Side-No Net 1" (solid, remove dead copper, pour order 70): 1355,1050 1355,1045 1429.69,1045 1430,1045.31 1430,1090 1430,1110 1350,1110
S7.4 on Component Side "Component Side-No Net 1" (solid, remove dead copper, pour order 71): 1410,1035 1420,1035 1445,1035 1455,1045 1500,1045 1500,985 1410,985
7.4V on Component Side "Component Side-No Net 1" (solid, remove dead copper, pour order 74): 1410,1030.61 1410,985 1500,985 1500,750 1320,750 1305,750 1305,905 1305,1045 1419.39,1045
CELL2 on Component Side "Component Side-No Net 1" (solid, remove dead copper, pour order 76): 1357.86,1046.67 1441.67,1046.67 1456.73,1061.73 1508.27,1061.73 1508.27,861.73 1510,860 1510,824.53 1580,824.53 1580,1215 1555,1270 1510,1315 1465,1360 1350,1360 1350,1275 1470,1275 1475,1275 1480,1270 1480,1190 1475,1190 1430,1145 1430,1110 1425,1105 1365,1105
CELL1 on Component Side "Component Side-No Net 1" (solid, remove dead copper, pour order 78): 1400,1185.6 1400,1125 1385,1110 1315,1110 1260,1110 1250,1120 1235,1135 1235,1250 1165,1250 1165,1280 1165,1295 1170,1295 1300,1295 1300,1190 1310,1180 1315.6,1185.6 1357.86,1185.6
CELL2 on Component Side "Component Side-No Net 1" (solid, remove dead copper, pour order 79): 1495,1135 1485,1125 1355,1125 1355,1088.11 1362.07,1081.04 1500.3,1081.04
SW1 on Component Side "Component Side-No Net 1" (solid, remove dead copper, pour order 80): 930,1355 960,1355 965,1355 980,1370 985,1375 1005,1375 1025,1375 1030,1380 1030,1400 1035,1405 1200,1405 1200,1345 1015,1345 975,1345 970,1340 930,1340
S3.7 on Component Side "Component Side-No Net 1" (solid, remove dead copper, pour order 81): 1357.86,1197.14 1355,1200 1285,1200 1285,1270 1290,1275 1356.53,1275 1356.53,1268.47 1357.65,1267.35 1355.7,1265.41 1355.41,1265.41
CELL2 on Component Side "Component Side-No Net 1" (solid, remove dead copper, pour order 82): 1350,1282.65 1072.35,1282.65 1050,1305 1040,1315 930,1315 930,1340 1045,1340 1195,1340 1200,1345 1200,1405 1190,1415 1185,1410 965,1410 915,1410 915,1470 1305,1470 1350,1425 1350,1360 1385,1360 1390,1355 1390,1275
CELL1 on Component Side "Component Side-No Net 1" (solid, remove dead copper, pour order 83): 1050,1305 970,1305 970,1220 1040,1220 1135,1220 1165,1250 1170,1255 1170,1310
GND on Component Side "Component Side-No Net 1" (solid, remove dead copper, pour order 84): 495,1470 690,1470 690,1305 700,1295 705,1290 890,1290 890,1383.46 881.73,1391.73 995,1391.73 995,1225 990,1220 790,1220 500,1220 495,1215
S12 on Component Side "Component Side-No Net 1" (solid, remove dead copper, pour order 92): 1380,585 1425,585 1435,595 1465,595 1465,555 1460,550 1455,545 1405,545 1385,545 1380,550
S12 on Component Side "Component Side-No Net 1" (solid, remove dead copper, pour order 93): 1325,660 1325,620 1310,620 1305,615 1265,615 1265,665 1325,665
12V on Component Side "Component Side-No Net 1" (solid, remove dead copper, pour order 96): 1325,605 1410,605 1410,655 1405,660 1325,660
CELL2 on Component Side "Component Side-No Net 1" (solid, remove dead copper, pour order 97): 1580,828.07 1580,655 1580,515 1520,455 1335,270 965,270 965,325 1070,325 1295,325 1450,510 1465,875 1575,875 1580,880
CELL3 on Component Side "Component Side-No Net 1" (solid, remove dead copper, pour order 98): 1380,595 1380,415 1380,410 1295,325 965,325 935,325 930,330 885,330 870,330 870,350 930,350 960,350 965,350 985,370 1160,370 1225,370 1265,410 1280.01,425.01 1280.01,596.89
CELL3 on Component Side "Component Side-No Net 1" (solid, remove dead copper, pour order 99): 1135.33,364.86 1135,365.2 1135,385 1220,385 1245,410 1280,445 1280,505 1280,568.02 1281.44,569.46 1293.12,581.14 1293.12,585.16 1323.45,585.16 1341.12,567.49 1325,551.38 1325,320 1140,320 1130,310
CELL2 on Component Side "Component Side-No Net 1" (solid, remove dead copper, pour order 100): 875,325 882.2,325 985,325 985,280 975,270 920,270 890,300 880,310 875,310
SW2 on Component Side "Component Side-No Net 1" (solid, remove dead copper, pour order 101): 875,370 895,370 905,370 910,375 910,400 955,400 965,410 970,415 1135,415 1135,365.2 1135.33,364.86 1103.37,332.89 914.86,332.89 882.11,332.89 875,340
CELL1 on Component Side "Component Side-No Net 1" (solid, remove dead copper, pour order 102): 1297.35,750 1500,750 1500,540 1500,520 1395,415 1320,415 1285,415 1280,410
CELL1 on Component Side "Component Side-No Net 1" (solid, remove dead copper, pour order 103): 835,385 910,385 910,324.59 905,310 945,270 955,270 955,135 830,135 800,135 795,140 775,160 775,385
CELL1 on Component Side "Component Side-No Net 1" (solid, remove dead copper, pour order 105): 735,245 943.21,245 955,233.21 955,135 735,135
12V on Component Side "Component Side-No Net 1" (solid, remove dead copper, pour order 106): 1225,400 775,395 735,435 650,520 650,920 650,1020 695,1065 710,1080 1125,1080 1175,1080 1225,1005
CELL3 on Component Side "Component Side-No Net 1" (solid, remove dead copper, pour order 107): 1120,415 1195,415 1215,435 1205,445 1205,640 1320,640 1350,670 1355,665 1355,390 1355,380 1315,340 1310,335 1090,335
12V on Component Side "Component Side-No Net 1" (solid, remove dead copper, pour order 109): 1005,445 1025,425 1025,405 855,405 805,355 800,360 745,360 745,462.72 755.03,472.74 756,471.77 994.88,471.77
CELL1 on Component Side "Component Side-No Net 1" (solid, remove dead copper, pour order 117): 813.39,393.39 813.39,321.61 840,295 840,215 840,155 850,145 855,140 1055,140 1055,405 1070,420 1050,440 810,440 840,440 850,430
12V on Component Side "Component Side-No Net 1" (solid, remove dead copper, pour order 118): 610,615 585,640 585,1115 1040,1115 1060,1095 1150,1005 1150,665 1040,665 1025,650 1025,500 755,500 720,465
CELL2 on Component Side "Component Side-No Net 1" (solid, remove dead copper, pour order 119): 875,310 875,240 905,210 1055,210 1055,330 1050,335 880,335
S12 on Component Side "Component Side-No Net 1" (solid, remove dead copper, pour order 73): 1220,610 1325,610 1330,615 1330,670 1220,670
GND on Ground Plane (split plane): 886.88,1685.13 911.73,1684 936.53,1682.13 961.27,1679.5 985.92,1676.13 1010.45,1672.02 1034.84,1667.16 1059.08,1661.58 1083.14,1655.26 1107,1648.22 1130.64,1640.46 1154.02,1631.99 1177.15,1622.82 1199.98,1612.96 1222.51,1602.4 1244.71,1591.18 1266.56,1579.29 1288.03,1566.74 1309.13,1553.55 1329.81,1539.73 1350.06,1525.3 1369.87,1510.25 1389.22,1494.62 1408.09,1478.4 1426.46,1461.63 1444.31,1444.31 1461.63,1426.46 1478.4,1408.09 1494.62,1389.22 1510.25,1369.87 1525.3,1350.06 1539.73,1329.81 1553.55,1309.13 1566.74,1288.03 1579.29,1266.56 1591.18,1244.71 1602.4,1222.51 1612.96,1199.98 1622.82,1177.15 1631.99,1154.02 1640.46,1130.64 1648.22,1107 1655.26,1083.14 1661.58,1059.08 1667.16,1034.84 1672.02,1010.45 1676.13,985.92 1679.5,961.27 1682.13,936.53 1683.2,922.3 847.95,922.3 303.34,1466.91 315.93,1478.4 334.79,1494.62 354.14,1510.25 373.95,1525.3 394.21,1539.73 414.89,1553.55 435.98,1566.74 457.46,1579.29 479.31,1591.18 501.51,1602.4 524.03,1612.96 546.87,1622.82 569.99,1631.99 593.38,1640.46 617.01,1648.22 640.87,1655.26 664.93,1661.58 689.17,1667.16 713.57,1672.02 738.1,1676.13 762.75,1679.5 787.48,1682.13 812.29,1684 837.14,1685.13 861.21,1685.49 862.01,1685.41 862.81,1685.49
12V on Ground Plane (split plane): 842.24,913.6 843.89,912.5 845.84,912.11 1199.9,912.11 1199.9,432.11 1182.89,415.1 850,415.1 848.05,414.71 846.4,413.6 827.89,395.1 782.11,395.1 680.1,497.11 680.1,947.89 744.02,1011.81
CELL1 on Ground Plane (split plane): 163 vertices, not listed, extent 38.52,38.52 1685.49,1459.98
G3.7 on Power Plane (split plane): 1504.9,1257.89 1504.9,1197.11 1497.89,1190.1 1485.1,1190.1 1485.1,1197.79 1484.71,1199.74 1483.6,1201.4 1457.89,1227.11 1457.89,1272.21 1457.5,1274.16 1456.4,1275.81 1433.6,1298.6 1431.95,1299.71 1430,1300.1 1428.05,1299.71 1426.54,1298.7 1333.6,1298.7 1331.65,1298.31 1330,1297.21 1296.4,1263.6 1295.29,1261.95 1294.9,1260 1294.9,1220 1295.29,1218.05 1296.4,1216.4 1306.4,1206.4 1308.05,1205.29 1310,1204.9 1322.89,1204.9 1334.9,1192.89 1334.9,1175.1 1312.11,1175.1 1280.1,1207.11 1280.1,1272.89 1327.11,1319.9 1442.89,1319.9
S3.7 on Power Plane (split plane): 1447.69,1270.1 1447.69,1225 1448.08,1223.05 1449.19,1221.4 1474.9,1195.68 1474.9,1142.11 1467.89,1135.1 1427.11,1135.1 1420.1,1142.11 1420.1,1142.79 1420.1,1180 1419.71,1181.95 1418.6,1183.6 1403.6,1198.6 1401.95,1199.71 1400,1200.1 1342.11,1200.1 1328.6,1213.6 1326.95,1214.71 1325,1215.1 1312.11,1215.1 1305.1,1222.11 1305.1,1257.89 1335.72,1288.51 1429.28,1288.51
G7.4 on Power Plane (split plane): 1524.9,1067.89 1524.9,962.11 1512.89,950.1 1277.11,950.1 1265.1,962.11 1265.1,1071.85 1275.94,1071.85 1286.4,1061.4 1288.05,1060.29 1290,1059.9 1297.89,1059.9 1304.9,1052.89 1304.9,975 1305.29,973.05 1306.4,971.4 1308.05,970.29 1310,969.9 1465,969.9 1466.95,970.29 1468.6,971.4 1473.6,976.4 1474.71,978.05 1475.1,980 1475.1,1027.89 1488.6,1041.4 1489.71,1043.05 1490.1,1045 1490.1,1062.89 1502.11,1074.9 1517.89,1074.9
S7.4 on Power Plane (split plane): 1339.9,1107.89 1339.9,1045 1340.29,1043.05 1341.4,1041.4 1351.4,1031.4 1353.05,1030.29 1355,1029.9 1462.89,1029.9 1464.9,1027.89 1464.9,982.11 1462.89,980.1 1315.1,980.1 1315.1,1055 1314.71,1056.95 1313.6,1058.6 1303.6,1068.6 1301.95,1069.71 1300,1070.1 1292.11,1070.1 1283.15,1079.06 1283.15,1114.9 1332.89,1114.9
7.4V on Power Plane (split plane): 914.9,1147.89 914.9,1065 915.29,1063.05 916.4,1061.4 956.4,1021.4 958.05,1020.29 960,1019.9 1254.9,1019.9 1254.9,960 1255.29,958.05 1256.4,956.4 1271.4,941.4 1273.05,940.29 1275,939.9 1489.9,939.9 1489.9,772.11 1477.89,760.1 1255,760.1 1253.05,759.71 1251.4,758.6 1250.29,756.95 1249.9,755 1249.9,642.11 1237.89,630.1 1217.11,630.1 1210.1,637.11 1210.1,890 1209.71,891.95 1208.6,893.6 1148.6,953.6 1146.95,954.71 1145,955.1 740,955.1 738.05,954.71 736.4,953.6 735.29,951.95 734.9,950 734.9,650.1 587.11,650.1 585.1,652.11 585.1,682.89 597.11,694.9 635,694.9 636.95,695.29 638.6,696.4 648.6,706.4 649.71,708.05 650.1,710 650.1,957.89 687.11,994.9 795,994.9 796.95,995.29 798.6,996.4 813.6,1011.4 814.71,1013.05 815.1,1015 815.1,1142.89 827.11,1154.9 907.89,1154.9
NetD1_K on Power Plane (split plane): 744.9,1392.89 744.9,1267.11 592.89,1115.1 285,1115.1 283.05,1114.71 281.4,1113.6 201.4,1033.6 200.29,1031.95 199.9,1030 199.9,685 200.29,683.05 201.4,681.4 234.9,647.89 234.9,617.11 222.89,605.1 192.11,605.1 160.1,637.11 160.1,1042.89 272.11,1154.9 565,1154.9 566.95,1155.29 568.6,1156.4 708.6,1296.4 709.71,1298.05 710.1,1300 710.1,1397.89 717.11,1404.9 732.89,1404.9
CELL2 on Power Plane (split plane): 435 vertices, not listed, extent 38.52,38.52 1685.49,1685.49
12V on Power Plane (split plane): 1199.9,887.89 1199.9,635 1200.29,633.05 1201.4,631.4 1211.4,621.4 1213.05,620.29 1215,619.9 1240,619.9 1241.95,620.29 1243.6,621.4 1258.6,636.4 1259.71,638.05 1260.1,640 1260.1,664.9 1387.89,664.9 1389.9,662.89 1389.9,645 1389.9,632.11 1376.4,618.6 1375.29,616.95 1374.9,615 1374.9,372.11 1357.89,355.1 797.11,355.1 745.1,407.11 745.1,944.9 1142.89,944.9

## Keep-outs
Keep-Out Layer:
  circle w10: c862.01,862.01 r843.5
  lines w10: 1385,1520 1385,1525

## Other copper
Ground Plane (plane layer: these items are gaps in the copper):
  lines w10: 285.39,1477.65 845.84,917.21 1704.16,917.21 ; 745,1018.05 743.05,1018.05 675,950 675,495 780,390 830,390 850,410 1185,410 1205,430 1205,917.21
Power Plane (plane layer: these items are gaps in the copper):
  rectangle: 1255,670 1310,755
  rectangle: 1300,670 1390,755
  lines w10: 40,1045 155,1045 ; 740,645 585,645 580,650 580,685 595,700 635,700 645,710 645,960 685,1000 795,1000 810,1015 810,1145 825,1160 910,1160 920,1150 920,1065 960,1025 1260,1025 ; 1255,670 1390,670 1395,665 1395,645 1395,630 1380,615 1380,370 1360,350 1045,350 795,350 740,405 740,950 1145,950 1205,890 1205,635 1215,625 1240,625 1255,640 1255,755 1480,755 1495,770 1495,945 ; 1278.05,1115.29 1278.05,1076.95 ; 1280,1120 1335,1120 1345,1110 1345,1045 1355,1035 1410,1035 ; 1340,1115 1355,1130 1425,1130 ; 1405,1035 1465,1035 1470,1030 ; 1430,1295 1452.79,1272.21 1452.79,1225 1480,1197.79 1480,1140 1470,1130 1425,1130 ; 1430,1325 1430,1330 1430,1350 1496.53,1416.53 1496.53,1418.47 ; 1431.4,1293.6 1333.6,1293.6 1300,1260 1300,1220 1310,1210 1325,1210 1340,1195 ; 1480,1185 1500,1185 1510,1195 1510,1260 1445,1325 1325,1325 1275,1275 1275,1205 1310,1170 1340,1170 1340,1195 ; 155,1045 155,635 190,600 225,600 240,615 240,650 205,685 205,1030 285,1110 595,1110 750,1265 750,1395 735,1410 715,1410 705,1400 705,1300 565,1160 270,1160 155,1045 ; 1278.05,1076.95 1290,1065 1300,1065 1310,1055 1310,975 1465,975 1470,980 1470,1030 ; 1278.05,1076.95 1260,1076.95 1260,960 1275,945 1515,945 1530,960 1530,1070 1520,1080 1500,1080 1485,1065 1485,1045 1470,1030 ; 1340,1195 1400,1195 1415,1180 1415,1142.79 1415,1140 1425,1130

## Silkscreen, mask and mechanical layers (free items; w line width, h text height)
Top Overlay:
  rectangle: 965,1285 990,1310
  rectangle: 905,295 930,320
  rectangle: 1140,1070 1165,1095
  rectangle: 1140,645 1170,675
  rectangle: 1380,545 1405,560.63
  rectangle: 1320,1084.37 1350,1100
  rectangle: 1410,1125 1440,1150.63
  lines w10: 520,1230 550,1200 605,1200 625,1180 625,1160 625,1005 615,995 595,995 ; 595,1065 625,1065 ; 595,1140 625,1140
  text "By:" at 600,1530 h100
  text "警告：" at 280,1370 h78.74
  text "看到灯亮" at 205,1290 h78.74
  text "检查极性！" at 205,1215 h78.74
  text "0" at 540,1120 h78.74
  text "3V7" at 1135,1045 h78.74 r90
  text "1" at 545,1040 h78.74
  text "7V4" at 1570,1005 h78.74 r90
  text "2" at 545,970 h78.74
  text "1-2S" at 370,870 h100
  text "V+" at 1155,805 h100 r90
  text "均衡" at 180,795 h78.74 r90
  text "2-3S" at 365,790 h100
  text "Project" at 245,685 h130
  text "Difftorch" at 190,590 h130
  text "Batt Holder" at 1570,580 h78.74 r90
  text "Extreme" at 250,510 h130
  text "JLCJLCJLCJLC" at 715,440 h70
  text "12V" at 1230,340 h78.74
  text "V1.1" at 770,90 h100
Bottom Overlay:
  circle w59.06: c862.01,862.01 r147.5
  circle w10: c357.09,862.01 r314.96
  circle w10: c1114.45,1299.29 r314.96
  circle w10: c1114.49,424.72 r314.96
  text "-" at 920,1400 h196.85 r60
  text "Batt1" at 1510,1360 h100 r90
  text "Batt0" at 445,1195 h100
  text "-" at 1385,1130 h196.85 r60
  text "21700(>20A)" at 1570,1060 h80 r90
  text "+" at 265,1040 h196.85
  text "Only" at 1645,925 h80 r90
  text "+" at 1080,625 h196.85
  text "Batt2" at 1505,550 h100 r90
  text "+" at 310,545 h196.85
  text "+" at 1085,100 h196.85
Top Solder:
  rectangle: 801.89,500 920,618.11
  text "Restoner_35" at 745,1535 h118.11
Bottom Solder:
  region: 700.33,1031 797.08,1098.74 706.75,1227.75 610,1160
  rectangle: 1080,800 1198.11,918.11
  region: 565,1490 531.13,1538.38 402.13,1448.05 436,1399.67
Mechanical 9:
  lines w10: 160,975 195,975 210,960 210,800 225,785 345,785 355,795 355,940 365,950 520,950 530,960 530,1175 515,1190 400,1190 380,1210 290,1210 280,1200 280,1180 265,1165 200,1165 160,1125 160,975